# Altium PCB Microphone.PcbDoc
Units mil, origin at the board's own origin, x right, y up, seen from the top; angles counter-clockwise.
Board outline 386.77 x 273.66 mil, 2 copper layers (Top Layer, Bottom Layer); 5 components, 43 nets, 22 pads, 11 vias.
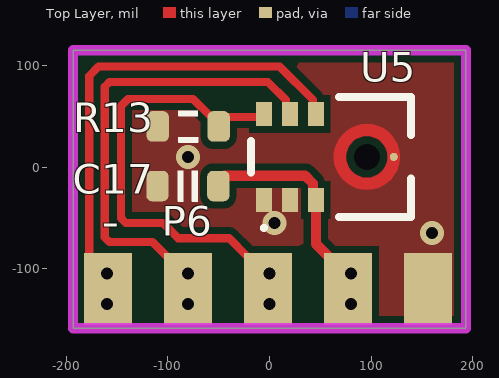
[diagram p0: Top Layer view]
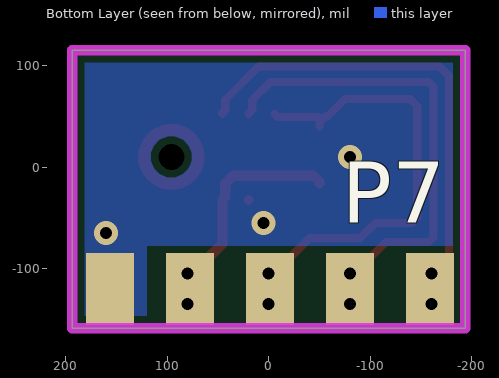
[diagram p1: Bottom Layer view, seen from below]

## Layer stack, top to bottom
Top Solder: solder mask 0.4, Solder Resist, Dk 3.5
Top Layer: signal copper 1.4
Dielectric 1: dielectric 12.6, FR-4, Dk 4.8
Bottom Layer: signal copper 1.4
Bottom Solder: solder mask 0.4, Solder Resist, Dk 3.5

## Board outline
-193.39,-158.66 193.39,-158.66 193.39,115 -193.39,115

## Design rules (kind name [scope] priority, off if disabled: settings)
Clearance [All] p1: gap=7 ignorepadtopadclearanceinfootprint=FALSE except(0: Arc-Hole Track-Hole SMDPad-Hole THPad-Hole Via-Hole Fill-Hole Poly-Hole Region-Hole Text-Hole)
PlaneClearance [All] p1: clearance=30
PlaneConnect [All] p1: planeconnectstyle=Direct reliefexpansion=20 reliefentries=4 reliefconductorwidth=10 reliefairgap=10
PolygonConnect [All] p1: connectstyle=Direct reliefconductorwidth=10 reliefentries=4 polygonreliefangle="90 Angle" airgapwidth=10
RoutingVias [All] p1: holewidth=28 width=50 viastyle="Through Hole" minholewidth=28 minwidth=50 maxholewidth=28 maxwidth=50
SolderMaskExpansion [All] p1: expansion=4 istentingtop=FALSE
Width [All] p1: maxlimit=60 minlimit=7 preferedwidth=10 minimp=50.000000 maximp=50.000000 favimp=50.000000
28 further rules are at their usual default settings.

## Components (designator, comment, footprint, x,y, rotation, side; value= is the part's Value field where it differs from the comment)
C17 "C0603" CAP_0603 -80.3,-18.65 r0 top value=0.1uF
P6 "Header" "ICS-43432 Pin" -1.26,-120 r0 top
P7 "Header" "ICS-43432 Pin" -1.26,-120 r180 bottom
R13 "R0402" RES_0603 -80,40 r0 top value=100K
U5 "ICS-43432" INSE-ICS-43432_V 58.43,10 r0 top

## Footprints (in the part's own frame and the unit in brackets; to place one, negate y for a bottom-side part, rotate by r counter-clockwise, add the part's x,y. Pads: shape width x height; smd on the part's side, far side on the other; paste and mask are expansions set on the pad)
CAP_0603 [mil] "Capacitance SMD Package 0603 L-1.6mm W-0.8mm"
  rrect50% 22x30 smd: 1(-30,0) 2(30,0)
  silkscreen extent -10,-15 10,15, body extent -31,-16 32,16, height 24
"ICS-43432 Pin" [mm]
  rect 1.2x1.8 smd mask+0: 1(4,0) 2(2,0) 3(0,0) 4(-2,0) 5(-4,-0.006)
INSE-ICS-43432_V [mm] "SMD, 7-Leads, Body 4x3mm, Pitch 0.65mm"
  rect 0.4x0.6 smd paste-0.05: 1(-1.625,-1.075) 2(-0.975,-1.075) 3(-0.325,-1.075) 5(-0.325,1.075) 6(-0.975,1.075) 7(-1.625,1.075)
  round 0.2 smd paste-0.5: 4(1.625,0)
  round 0.2 hole 0.65 unplated: 8(0.95,0)
  Top Layer region: 0.95,-0.825 0.592,-0.743 0.305,-0.514 0.146,-0.184 0.146,0.184 0.305,0.514 0.592,0.743 0.95,0.825 0.95,0.825 0.95,0.525 0.722,0.473 0.54,0.327 0.438,0.117 0.438,-0.117 0.54,-0.327 0.722,-0.473 0.95,-0.525 0.95,-0.525
  Top Layer region: 0.95,-0.825 1.308,-0.743 1.595,-0.514 1.754,-0.184 1.754,0.184 1.595,0.514 1.308,0.743 0.95,0.825 0.95,0.825 0.95,0.525 1.178,0.473 1.36,0.327 1.462,0.117 1.462,-0.117 1.36,-0.327 1.178,-0.473 0.95,-0.525 0.95,-0.525
  silkscreen extent -1.95,-1.82 2.05,1.5, body extent -1.95,-1.5 2.05,1.5, height 1.1
RES_0603 [mil] "Resistance SMD Package 0603 L-1.6mm W-0.8mm"
  rrect50% 22x30 smd: 1(-30,0) 2(30,0)
  silkscreen extent -10,-16 10,16, body extent -31,-16 32,16, height 18

## Part data
C17: library part Cap_0603, "Capacitor SMD", Case/Package=0603, PartNumber=Capacitor, Specification="X7R 50V"
P6 P7: library part "ICS-43432 Pin"
R13: library part Res_0603, "Resistor SMD", Case/Package=0603, PartNumber=Resistor, Specification=±1%
U5: library part CMP-2000-06439-1, "Low Noise Microphone with I2S Digital Output, 1 mA, -40 to 85 degC, 7-Pin SMD, RoHS, Tape and Reel", Current - Supply=1.5mA, Frequency Range=50Hz~20kHz, Manufacturer=InvenSense, Package Description="7-Pin Surface Mount Device, Body 4 x 3 mm, Pitch 0.65 mm, Height 1.1 mm", Seal Rating=None, Voltage - Rated=-, Voltage Range=1.62~3.63V, Category=AudioProducts, Datasheet URL=https://www.invensense.com/wp-content/uploads/2015/02/ICS-43432-data-sheet-v1.3.pdf, Datasheet Version="Rev. 1.3, 04/2016", Direction=Omnidirectional, Family=Microphones, Height (Max)=1.10mm, Impedance=-, Manufacturer URL=http://www.invensense.com/, Mounting Technology=SurfaceMount, Output Type=Digital,I²S, Package Reference=ICS-43432, Packaging=Tape&amp;Reel(TR), Port Location=Bottom, S/N Ratio=65dB, Sensitivity=-26dB±1dB@94dBSPL, Series=-, Shape=Rectangular, Size / Dimension=4.00mmLx3.00mmW, Termination=SolderPads, Type=MEMS(Silicon)

## Via types
v1: diameter 23.62, hole 11.81, Top Layer to Bottom Layer, tented both sides, 11 vias

## Nets (pads, with @x,y where several pads share a name; then routed paths per layer and width w, separated by ;. In a path a pad name is that pad's centre, name@x,y a point inside that pad or via, vN(x,y) a via of type N, cw(c..) or ccw(c..) an arc to the next point about the centre after c; other vN are vias at no path point)
3.3V: C17.2 P6.2 P7.4 U5.3 | length 217.7
  Top Layer w8: P6.2@62.9,-98.94 P6.2@82.52,-118.56
  Top Layer w10: C17.2@-50,-16.27 -50,-14.47 -44.04,-8.51 35.1,-8.51 42.76,-16.17 42.76,-29.45 U5.3 45.63,-75.63 P6.2@57.87,-87.87 ; P6.2@78.74,-118.31 P6.2@78.74,-106.5
  other v1: 80,-135 80,-105
"Battery ADC": 
BOOT0: 
butter: 
CLK: P6.4 P7.2 U5.6 | length 487.8
  Top Layer w8: P6.4@-97.1,-98.94 P6.4@-77.48,-118.56 ; P6.4@-78.74,-118.31 -78.74,-109.45 -99.62,-88.57 -100.47,-88.57 -115.22,-73.82 -157.47,-73.82 -162.16,-69.13 -162.16,79.09 -157.47,83.77 -1.76,83.77 16.17,65.85 16.17,56.2 U5.6
  other v1: -80,-135 -80,-105
GND: C17.1 P6.1 P7.5 R13.1 U5.1 U5.2 U5.4 | length 0
  other v1: 160,-65 5,-55 -80,10
I2S_CK: 
I2S_SD: 
I2S_WS: 
LCD_CS: 
LCD_DC: 
LCD_RES: 
NetB1_1: 
NetC8_1: 
NetC8_2: 
NetCON1_A5: 
NetCON1_B5: 
NetD1_1: 
NetD1_2: 
NetD2_2: 
NetD3_1: 
NetP5_8: 
NetQ1_1: 
NetQ1_4: 
NetQ1_5: 
NetQ3_1: 
NetR6_2: 
NetR8_1: 
OSC_IN: 
OSC_OUT: 
RST: 
SD: P6.3 P7.3 R13.2 U5.7 | length 466.8
  Top Layer w8: R13.2 -50,43.73 -52.51,46.23 -55.96,49.69 -57.87,49.69 -75.18,67 -139.16,67 -146.16,60 -146.16,-50.31 -141.47,-55 -105,-55 -90,-70 -40,-70 -21.43,-88.57 -20.88,-88.57 0,-109.45 P6.3@0,-110 ; R13.2@-49.37,49.37 -8.43,49.37 -5.55,52.24 U5.7 ; P6.3@-17.1,-98.94 P6.3@2.52,-118.56
  other v1: 0,-135 0,-105
SPI_MOSI: 
SPI_SCK: 
SYS_SWCLK: 
SYS_SWDIO: 
UGND: 
USART_Rx: 
USART_Tx: 
VBUS: 
VCC: 
VIN: 
WS: P6.5 P7.1 U5.5 | length 470.6
  Top Layer w8: P6.5@-157.48,-118.56 -177.39,-98.65 -177.39,89.76 -168.14,99 10.02,99 42.76,66.26 42.76,55.2 U5.5 U5.5@46.63,53.32
  other v1: -160,-135 -160,-105
pads on no net: U5.8

## Polygon pours and split planes (outlines as drawn)
GND on Bottom Layer "GND_L02_P001" (solid, pour order 1): -193.39,-158.66 193.39,-158.66 193.39,115 -193.39,115
GND on Top Layer "GND_L01_P000" (solid, pour order 0): -193.39,-158.66 193.39,-158.66 193.39,115 -193.39,115

## Keep-outs
Keep-Out Layer:
  the board outline again, w10

## Other copper
Bottom Layer:
  pour cut-out: -181.15,-77.57 120,-77.57 120,-160 -180,-160

## Silkscreen, mask and mechanical layers (free items; w line width, h text height)
Top Overlay:
  text "-" at -165,-81.54 h60